# EAGLE board Main_bakup (EAGLE 7.2.0)
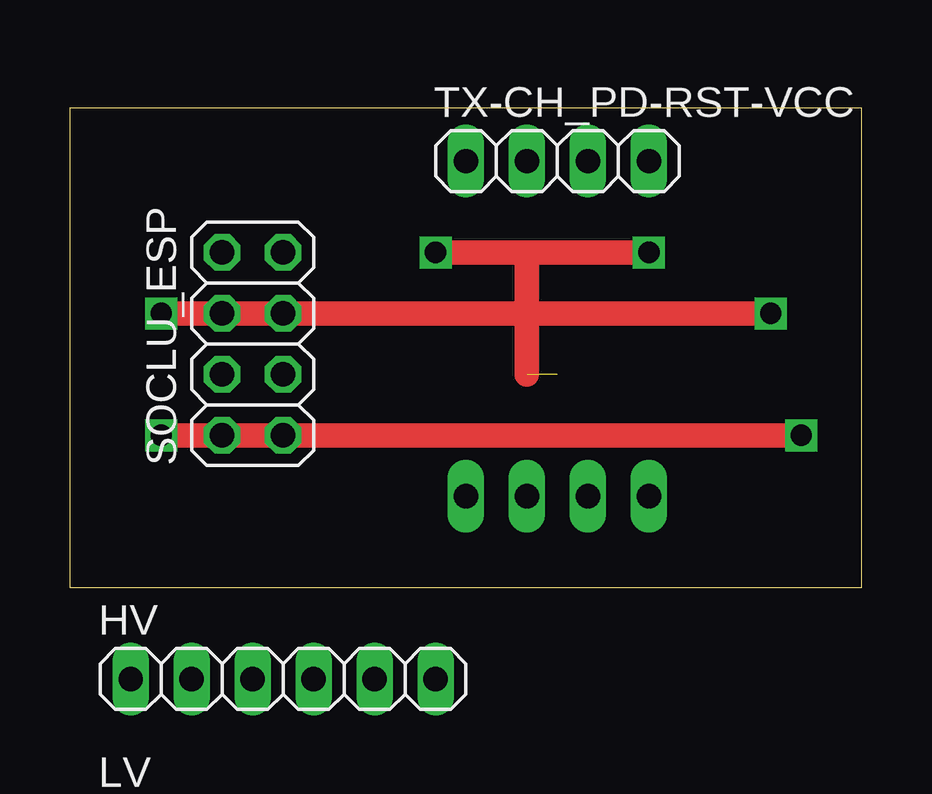
[diagram p0: board, top side]
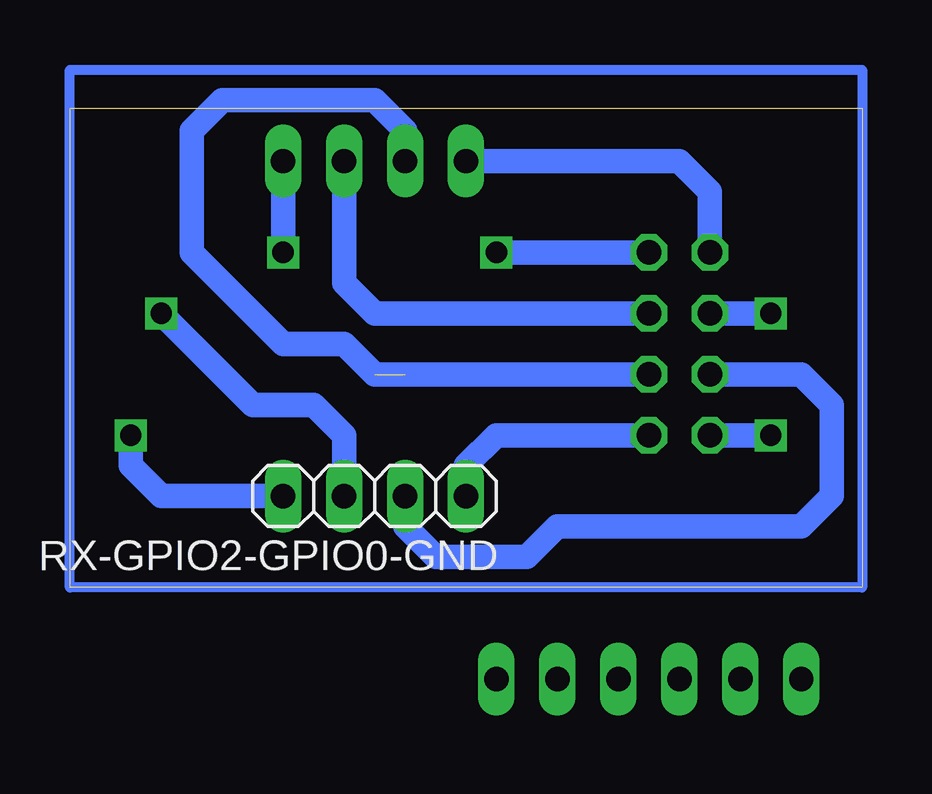
[diagram p1: board, bottom side, seen from below]

Size 33 x 19.99 mm. Coordinates in mm from the lower left corner, seen from the top.
Outline: 0,0 33,0 33,19.99 0,19.99 0,0
Copper layers (1*16): Top 0.035mm / dielectric 1.5mm / Bottom 0.035mm
Design rules "default *": minimum track width 40mil, minimum drill 35mil, track to track 12mil, track to pad 12mil, pad to pad 8mil, via to via 8mil, smd to smd 8mil, copper to edge 40mil, drill to drill 8mil, minimum pad ring 10mil, minimum via ring 8mil, stop-mask expansion 4mil, vias tented up to drill 0mil, thermal gap 10mil
Net classes: 0 default: width 0.032 mm, drill 0.032 mm

## Footprints (pad centres in the part's own frame; a part is rotated, then mirrored left to right if it is on the bottom)
1X06 = drill 1.016 long: 1 -6.35,0; 2 -3.81,0; 3 -1.27,0; 4 1.27,0; 5 3.81,0; 6 6.35,0
1X04 = drill 1.016 long: 1 -3.81,0; 2 -1.27,0; 3 1.27,0; 4 3.81,0
2X04 = drill 1.016 octagon: 1 -3.81,-1.27; 2 -3.81,1.27; 3 -1.27,-1.27; 4 -1.27,1.27; 5 1.27,-1.27; 6 1.27,1.27; 7 3.81,-1.27; 8 3.81,1.27

## Placement (x,y rotation side)
HV  [1X06]  8.89,-3.81 0 top  (outside the outline)
LV  [1X06]  8.89,-10.16 0 top  (outside the outline)
RX-GPIO2-GPIO0-GND  [1X04]  20.32,3.81 180 bottom
SOCLU_ESP  [2X04]  7.62,10.16 90 top
TX-CH_PD-RST-VCC  [1X04]  20.32,17.78 0 top

## Library data of the parts
HV LV RX-GPIO2-GPIO0-GND SOCLU_ESP TX-CH_PD-RST-VCC = pinhead

## Nets
N$1: SOCLU_ESP.7 TX-CH_PD-RST-VCC.4
N$2: SOCLU_ESP.5 TX-CH_PD-RST-VCC.3
N$3: SOCLU_ESP.3 TX-CH_PD-RST-VCC.2
N$4: SOCLU_ESP.8 TX-CH_PD-RST-VCC.1
N$5: RX-GPIO2-GPIO0-GND.1 SOCLU_ESP.1
N$7: RX-GPIO2-GPIO0-GND.4 SOCLU_ESP.2
N$8: RX-GPIO2-GPIO0-GND.3 SOCLU_ESP.6
N$9: RX-GPIO2-GPIO0-GND.2 SOCLU_ESP.4

## Tracks (layer width: path | path; a pad name or v marks a point on that pad's centre or on a via)
N$1  (via drill 0.89)
  Top 1.016: v15.24,13.97 v24.13,13.97
  Bottom 1.016: SOCLU_ESP.7 v15.24,13.97 | v24.13,13.97 TX-CH_PD-RST-VCC.4
N$2
  Bottom 1.016: SOCLU_ESP.5 20.32,11.43 21.59,12.7 TX-CH_PD-RST-VCC.3
N$3  (1 unrouted)
  Top 1.016: 19.05,8.89 19.05,13.97
  Bottom 1.016: SOCLU_ESP.3 20.32,8.89 21.59,10.16 24.13,10.16 27.94,13.97 27.94,19.05 26.67,20.32 20.32,20.32 19.05,19.05 TX-CH_PD-RST-VCC.2
N$4
  Bottom 1.016: TX-CH_PD-RST-VCC.1 7.62,17.78 6.35,16.51 SOCLU_ESP.8
N$5
  Bottom 1.016: RX-GPIO2-GPIO0-GND.1 16.51,5.08 15.24,6.35 SOCLU_ESP.1
N$7  (via drill 0.89)
  Top 1.016: v30.48,6.35 v3.81,6.35
  Bottom 1.016: RX-GPIO2-GPIO0-GND.4 29.21,3.81 30.48,5.08 v30.48,6.35 | v3.81,6.35 SOCLU_ESP.2
N$8  (via drill 0.89)
  Top 1.016: v29.21,11.43 v3.81,11.43
  Bottom 1.016: v3.81,11.43 SOCLU_ESP.6 | v29.21,11.43 25.4,7.62 22.86,7.62 21.59,6.35 RX-GPIO2-GPIO0-GND.3
N$9
  Bottom 1.016: SOCLU_ESP.4 2.54,8.89 1.27,7.62 1.27,3.81 2.54,2.54 12.7,2.54 13.97,1.27 17.78,1.27 19.05,2.54 RX-GPIO2-GPIO0-GND.2
N$10
  Bottom 0.406: 0,21.59 0,0 33.02,0 33.02,21.59 0,21.59